# Altium PCB PCB1.PcbDoc (part 1 of 2)
Units mm, origin at the board's own origin, x right, y up, seen from the top; angles counter-clockwise.
Board outline 98 x 50 mm, 2 copper layers (Top Layer, Bottom Layer), stack 1.534 mm thick; 54 components, 28 nets, 136 pads, 101 vias.
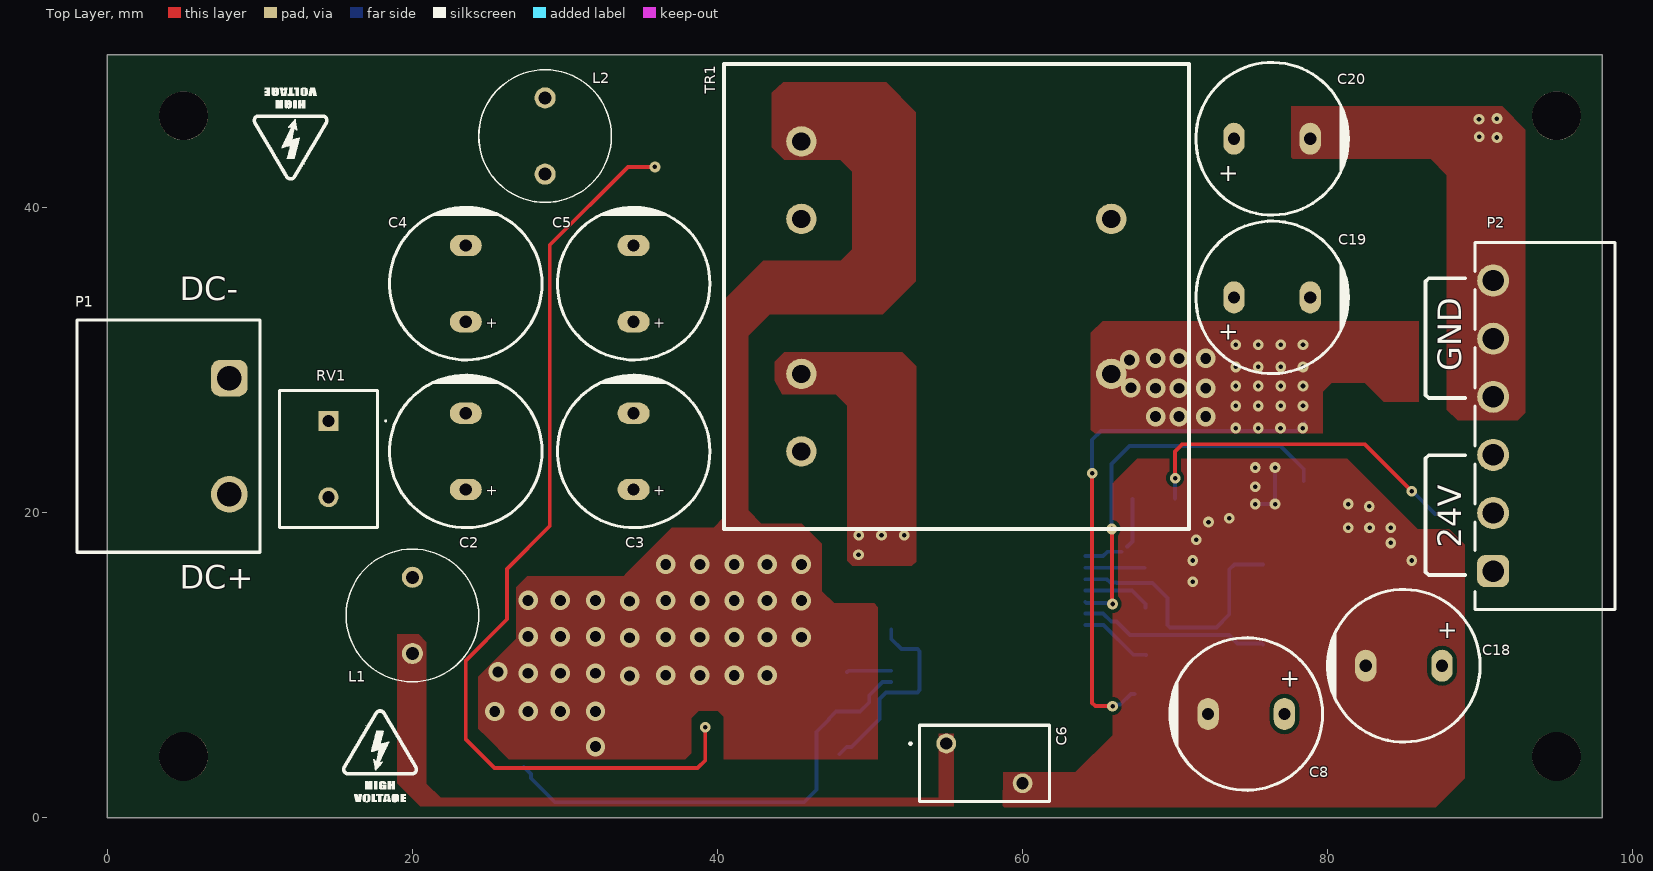
[diagram p0: Top Layer view]
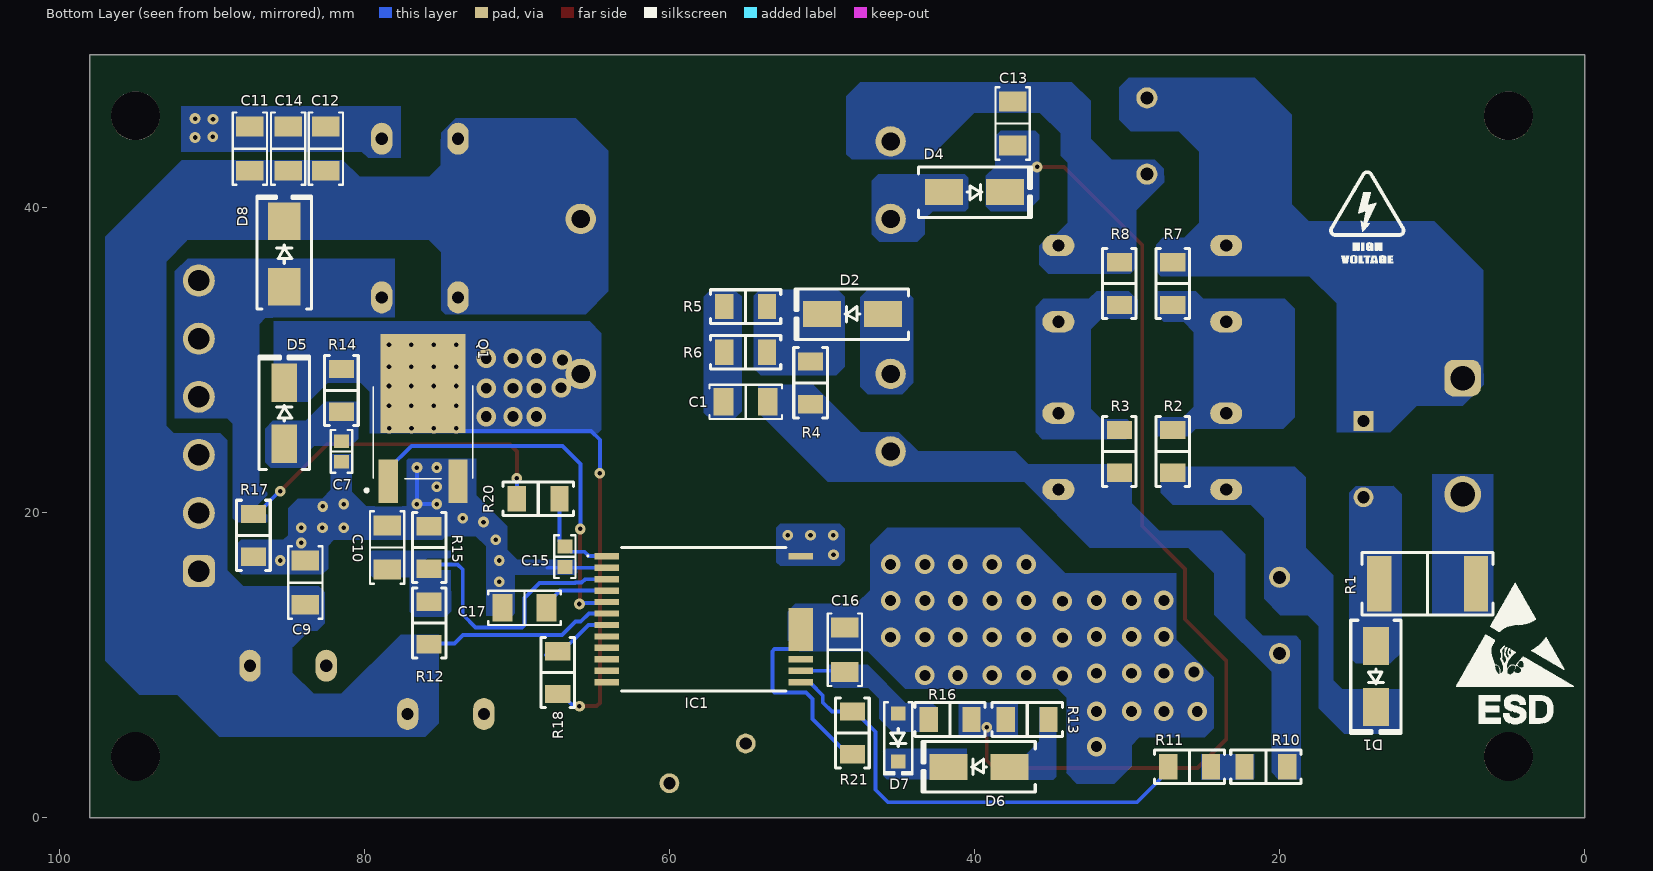
[diagram p1: Bottom Layer view, seen from below]
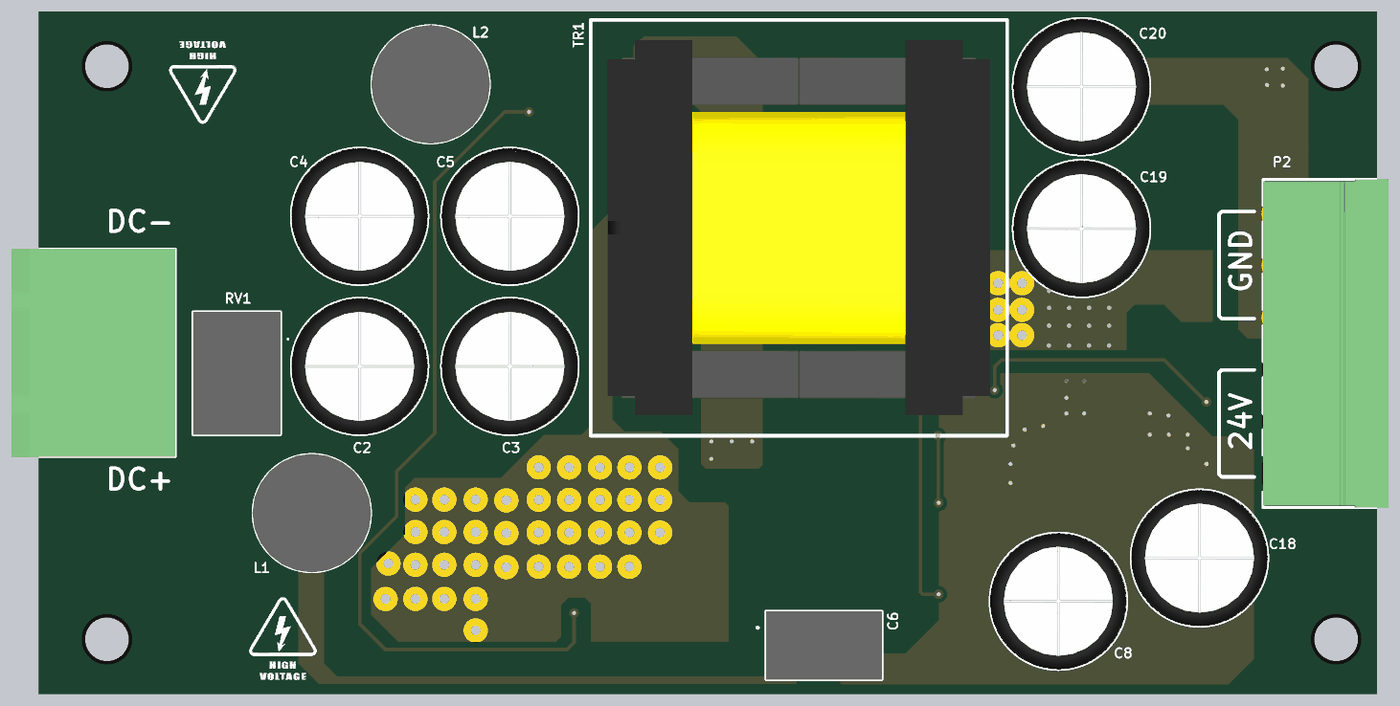
[diagram p2: 3D render of the assembled board from above, using the file's embedded part models]
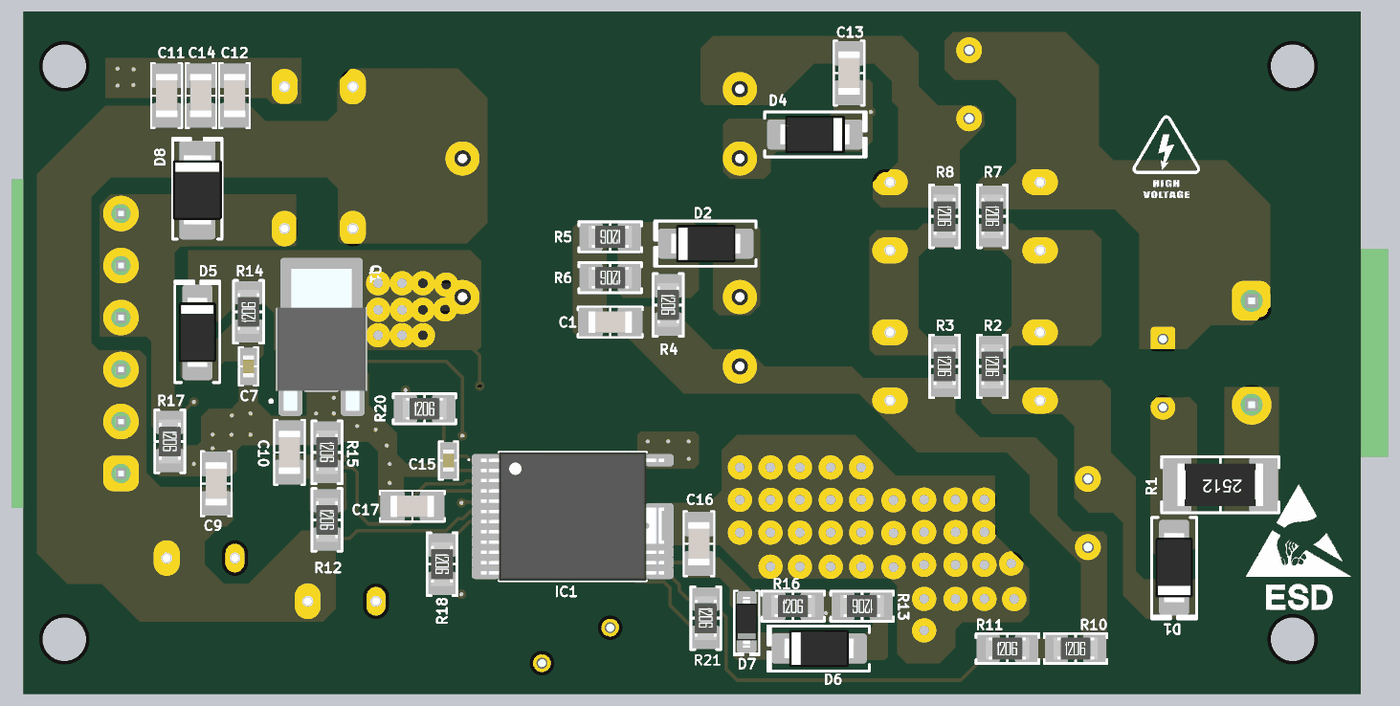
[diagram p3: 3D render of the assembled board from below, using the file's embedded part models]

## Layer stack, top to bottom
Top Solder: solder mask 0.0127, Solder Resist, Dk 3.3
Top Layer: signal copper 0.0178
Dielectric1: core 1.4986, FR-4, Dk 4.3
Bottom Layer: signal copper 0.0178
Bottom Solder: solder mask 0.0127, Solder Resist, Dk 3.3

## Board outline
0,0 0,50 98,50 98,0

## Design rules (kind name [scope] priority, off if disabled: settings)
Clearance Clearance_1 [OnMid vs OnMid] p1: gap=0.254 ignorepadtopadclearanceinfootprint=FALSE sourcerule=38 cellrowname=All cellrowtype=0 cellcolname=All cellcoltype=0 innerlayers=TRUE
Clearance Clearance_2 [(ExistsOnLayer('Top Layer') Or ExistsOnLayer('Bottom Layer')) vs (ExistsOnLayer('Top Layer') Or ExistsOnLayer('Bottom Layer'))] p2: gap=0.254 ignorepadtopadclearanceinfootprint=FALSE sourcerule=38 cellrowname=All cellrowtype=0 cellcolname=All cellcoltype=0 outerlayers=TRUE
Clearance [All] p3: gap=0.254 ignorepadtopadclearanceinfootprint=FALSE ismatrix=TRUE
HoleSize [All] p1: absolutevalues=TRUE maxlimit=7.62 minlimit=0.254 maxpercent=80.000 minpercent=20.000
MinimumAnnularRing [All] p1: minimumring=0.254
PasteMaskExpansion [All] p1: expansion=0.254
PlaneClearance [All] p1: clearance=0.381
PlaneConnect [All] p1: planeconnectstyle=Direct reliefexpansion=0.508 reliefentries=4 reliefconductorwidth=0.254 reliefairgap=0.254
PolygonConnect [All] p1: connectstyle=Direct reliefconductorwidth=0.254 reliefentries=4 polygonreliefangle="90 Angle" airgapwidth=0.254
RoutingVias [All] p1: holewidth=0.711 width=1.27 viastyle="Through Hole" minholewidth=0.711 minwidth=1.27 maxholewidth=0.711 maxwidth=1.27
SMDNeckDown [All] p1: percent=100.000
SilkToSolderMaskClearance SilkscreenOverComponentPads [IsPad] p1: minsilkscreentomaskgap=0.254 clearancetoexposedcopper=TRUE
SolderMaskExpansion [All] p1: expansion=0.254 istentingtop=FALSE
Width [All] p1: maxlimit=0.254 minlimit=0.254 preferedwidth=0.254
25 further rules are at their usual default settings.

## Components (designator, comment, footprint, x,y, rotation, side; value= is the part's Value field where it differs from the comment)
C1 "C1206X222KGRAC7800" "CAP 1206_3216 - 0.8MM" 55,27.25 r180 bottom value="2200 pF"
C2 "ESK106M400AH2EA" "CAP TH ALUM ELEC D10.00mm S5.00mm H17.00mm" 23.5,24 r270 top value=10µF
C3 "ESK106M400AH2EA" "CAP TH ALUM ELEC D10.00mm S5.00mm H17.00mm" 34.5,24 r270 top value=10µF
C4 "ESK106M400AH2EA" "CAP TH ALUM ELEC D10.00mm S5.00mm H17.00mm" 23.5,35 r270 top value=10µF
C5 "ESK106M400AH2EA" "CAP TH ALUM ELEC D10.00mm S5.00mm H17.00mm" 34.5,35 r270 top value=10µF
C6 "F471K33Y5RP6UK5R" F471K33Y5RP6UK5R 55,4.85 r0 top
C7 "CL10B102KB8NNNC" "CAP 0603_1608" 81.5,24 r270 bottom value="1000 pF"
C8 "UVY1V331MPD1TD" "CAP TH ALUM ELEC D10.00mm S5.00mm H14.00mm" 74.662,6.787 r0 top value=330µF
C9 "CL31B225KBHNNNE" "CAP 1206_3216 - 0.8MM" 83.871,15.4 r270 bottom value="2.2 µF"
C10 "885012208072" "CAP 1206_3216 - 0.8MM" 78.5,17.7 r270 bottom value="330 pF"
C11 "CL31A106MBHNNNE" "CAP 1206_3216 - 0.8MM" 87.5,43.85 r270 bottom value="10 µF"
C12 "CL31B225KBHNNNE" "CAP 1206_3216 - 0.8MM" 82.524,43.85 r270 bottom value="2.2 µF"
C13 "CL31A106MBHNNNE" "CAP 1206_3216 - 0.8MM" 37.5,45.5 r270 bottom value="10 µF"
C14 "CL31A106MBHNNNE" "CAP 1206_3216 - 0.8MM" 84.996,43.85 r270 bottom value="10 µF"
C15 "CL10B102KB8NNNC" "CAP 0603_1608" 66.85,17.1 r270 bottom value="1000 pF"
C16 "CL31A106MBHNNNE" "CAP 1206_3216 - 0.8MM" 48.5,11 r90 bottom value="10 µF"
C17 "CL31B225KBHNNNE" "CAP 1206_3216 - 0.8MM" 69.5,13.75 r0 bottom value="2.2 µF"
C18 "UVY1V331MPD1TD" "CAP TH ALUM ELEC D10.00mm S5.00mm H14.00mm" 84.996,9.952 r0 top value=330µF
C19 "UVY1V331MPD1TD" "CAP TH ALUM ELEC D10.00mm S5.00mm H14.00mm" 76.356,34.1 r180 top value=330µF
C20 "UVY1V331MPD1TD" "CAP TH ALUM ELEC D10.00mm S5.00mm H14.00mm" 76.356,44.5 r180 top value=330µF
D1 "US1ML-TP" "DO214AC SMA" 13.684,9.25 r270 bottom
D2 "US1ML-TP" "DO214AC SMA" 48,33 r0 bottom
D4 "US1ML-TP" "DO214AC SMA" 40,41 r180 bottom
D5 "US1ML-TP" "DO214AC SMA" 85.25,26.5 r90 bottom
D6 "US1ML-TP" "DO214AC SMA" 39.7,3.325 r0 bottom
D7 "MMSZ5242B-7-F" SOD-123 45,5.25 r270 bottom
D8 "SMBJ24CD-M3/I" "DO214AA SMB" 85.25,36.935 r90 bottom
IC1 "INN3696C-H606-TL" INN3696CH606TL 57.75,13 r270 bottom
L1 "RLB0914-681KL" RLB0914681KL 20,15.75 r270 top
L2 "RLB0914-681KL" RLB0914681KL 28.7,47.175 r270 top
P1 "691313410002" 691313410002 4,25 r270 top
P2 "691322310006" 691322310006 94.248,25.676 r90 top
Q1 "FDD770N15A" FDD770N15A 76.15,25.25 r180 bottom
R1 "RMCF2512JT10R0" "RES 2512_6432" 10.3,15.325 r0 bottom value="10 Ohms"
R2 "RMCF1206FT100K" "RES 1206_3216" 27,24 r270 bottom value="100 kOhms"
R3 "RMCF1206FT100K" "RES 1206_3216" 30.5,24 r270 bottom value="100 kOhms"
R4 "RC1206FR-07680KL" "RES 1206_3216" 50.75,28.5 r270 bottom value="680 kOhms"
R5 "RC1206JR-7W22RL" "RES 1206_3216" 55,33.5 r0 bottom value="22 Ohms"
R6 "RC1206JR-7W22RL" "RES 1206_3216" 55,30.5 r0 bottom value="22 Ohms"
R7 "RMCF1206FT100K" "RES 1206_3216" 27,35 r270 bottom value="100 kOhms"
R8 "RMCF1206FT100K" "RES 1206_3216" 30.5,35 r270 bottom value="100 kOhms"
R10 "RC1206FR-071M8L" "RES 1206_3216" 20.9,3.325 r180 bottom value="1.8 MOhms"
R11 "RC1206JR-072ML" "RES 1206_3216" 25.9,3.325 r180 bottom value="2 MOhms"
R12 "RC1206JR-07180KL" "RES 1206_3216" 75.75,12.75 r270 bottom value="180 kOhms"
R13 "RC1206JR-0747RL" "RES 1206_3216" 36.543,6.427 r0 bottom value="47 Ohms"
R14 "RC1206JR-7W22RL" "RES 1206_3216" 81.5,28 r90 bottom value="22 Ohms"
R15 "RC1206FR-0710KL" "RES 1206_3216" 75.75,17.7 r270 bottom value="10 kOhms"
R16 "RC1206JR-073KL" "RES 1206_3216" 41.6,6.427 r180 bottom value="3 kOhms"
R17 "PA1206FRE070R01Z" "RES 1206_3216" 87.266,18.5 r270 bottom value="10 mOhms"
R18 "RC1206JR-0747RL" "RES 1206_3216" 67.325,9.5 r270 bottom value="47 Ohms"
R20 "RC1206JR-0747RL" "RES 1206_3216" 68.6,20.895 r180 bottom value="47 Ohms"
R21 "RC1206JR-070RL" "RES 1206_3216" 48,5.55 r270 bottom value="0 Ohms"
RV1 "MOV-07D781KK" MOV07D781KK 14.5,26 r270 top
TR1 "FlybackTransformer" FlybackTransformer 60.74,34.16 r90 top

## Footprints (in the part's own frame and the unit in brackets; to place one, negate y for a bottom-side part, rotate by r counter-clockwise, add the part's x,y. Pads: shape width x height; smd on the part's side, far side on the other; paste and mask are expansions set on the pad)
691313410002 [mm] "7.62 mm - Closed Horizonal PCB Header - 2p"
  rrect50% 2.4x2.4 hole 1.6: 1(-3.81,4)
  round 2.4 hole 1.6: 2(3.81,4)
  silkscreen extent -7.61,-6 7.61,6, body extent -7.62,-6 7.62,6, height 8.55
691322310006 [mm] "Horizontal PCB Header, pitch 3.81mm, 06p"
  rrect50% 2.1x2.1 hole 1.4: 1(-9.525,3.4)
  round 2.1 hole 1.4: 2(-5.715,3.4) 3(-1.905,3.4) 4(1.905,3.4) 5(5.715,3.4) 6(9.525,3.4)
  silkscreen extent -12.02,-4.6 12.03,4.6, body extent -12.02,-4.6 12.02,4.6, height 7.25
"CAP 0603_1608" [mm] "Chip Capacitor, 2-Leads, Body 1.60x0.80mm, IPC Medium Density"
  rect 0.9x1 smd: 1(-0.675,0) 2(0.675,0)
  silkscreen extent -1.4,-0.7 1.4,0.7, body extent -0.8,-0.41 0.8,0.41, height 0.82
"CAP 1206_3216 - 0.8MM" [mm] "Chip Capacitor, 2-Leads, Body 3.25x1.60mm, IPC Medium Density"
  rect 1.3x1.8 smd: 1(-1.45,0) 2(1.45,0)
  silkscreen extent -2.37,-1.12 2.37,1.12, body extent -1.6,-0.8 1.6,0.8, height 0.8
"CAP TH ALUM ELEC D10.00mm S5.00mm H14.00mm" [mm] "10mm Diameter 5mm Lead Spacing Aluminum Electrolytic Capacitors Radial, Can"
  oval 1.4x2.1 hole 0.8: 1(2.5,0) 2(-2.5,0)
  silkscreen extent -5,-5 5,5, body extent -5.01,-5 5,5, height 14
"CAP TH ALUM ELEC D10.00mm S5.00mm H17.00mm" [mm] "10mm Diameter 5mm Lead Spacing Aluminum Electrolytic Capacitors Radial, Can"
  oval 1.4x2.1 hole 0.8: 1(2.5,0) 2(-2.5,0)
  silkscreen extent -5,-5 5,5, body extent -5.01,-5 5,5, height 17
"DO214AA SMB" [mm] "Molded Diode, 2-Leads, Body 4.31x3.62mm, IPC Medium Density"
  rect 2.45x2.15 smd: 1(-2.15,0) 2(2.15,0)
  silkscreen extent -3.6,-1.8 3.8,1.8, body extent -2.6,-1.8 2.6,1.8, height 2.4
"DO214AC SMA" [mm] "Molded Diode, 2-Leads, Body 4.30x2.60mm, IPC Medium Density"
  rect 2.5x1.7 smd: 1(-2,0) 2(2,0)
  silkscreen extent -3.68,-1.65 3.75,1.65, body extent -2.6,-1.37 2.6,1.37, height 2.4
F471K33Y5RP6UK5R [mm]
  round 1.3 hole 0.8: 1(0,0) 2(5,-2.6)
  silkscreen extent -2.4,-3.8 6.75,1.2, body extent -1.75,-3.8 6.75,1.2, height 8.6
FDD770N15A [mm]
  rect 1.25x2.85 smd: 1(-2.28,-3.2) 3(2.28,-3.2)
  rect 5.55x6.5 smd: 2(0,3.2)
  silkscreen extent -3.8,-3.9 3.27,3.05, body extent -3.27,-4.5 3.27,5.89, height 2.49
FlybackTransformer [mm] "B66317G0160X187  Gapped ferrite fore / Coil former  66208B1110T001"
  round 2 hole 1.2: 1(-10.16,15.24) 2(-5.08,15.24) 3(5.08,-5.08) 4(-5.08,-5.08) 5(5.08,15.24) 6(10.16,15.24)
  silkscreen extent -15.24,-10.16 15.24,20.32, body extent -13.75,-8.92 13.75,19.08, height 22.9
INN3696CH606TL [mm]
  rect 0.41x1.58 smd: 1(-4.125,-6.36) 2(-3.375,-6.36) 3(-2.625,-6.36) 4(-1.875,-6.36) 5(-1.125,-6.36) 6(-0.375,-6.36) 7(0.375,-6.36) 8(1.125,-6.36) 9(1.875,-6.36) 10(2.625,-6.36) 11(3.375,-6.36) 12(4.125,-6.36) 13(4.125,6.36) 14(3.375,6.36) 15(2.625,6.36) 24(-4.125,6.36)
  rect 2.81x1.58 smd: 16(0.675,6.36)
  silkscreen extent -4.7,-7.65 4.7,5.4, body extent -4.7,-6.72 4.7,6.72, height 1.6
MOV07D781KK [mm]
  rect 1.3x1.3 hole 0.8: 1(0,0)
  round 1.3 hole 0.8: 2(5,0)
  silkscreen extent -2,-3.2 7,3.8, body extent -2,-3.2 7,3.2, height 13.6
"RES 1206_3216" [mm] "Chip Resistor, 2-Leads, Body 3.13x1.55mm, IPC Medium Density"
  rect 1.2x1.65 smd: 1(-1.4,0) 2(1.4,0)
  silkscreen extent -2.3,-1.1 2.3,1.1, body extent -1.6,-0.8 1.6,0.8, height 0.6
"RES 2512_6432" [mm] "Chip Resistor, 2-Leads, Body 6.30x3.15mm, IPC Medium Density"
  rect 1.6x3.65 smd: 1(-3.175,0) 2(3.175,0)
  silkscreen extent -4.3,-2.05 4.3,2.05, body extent -3.15,-1.58 3.15,1.57, height 0.7
RLB0914681KL [mm]
  round 1.381 hole 0.85: 1(0,0) 2(5,0)
  silkscreen extent -1.85,-4.35 6.85,4.35, body extent -1.85,-4.34 6.85,4.34, height 13.1
SOD-123 [mm] "SOD, 2-Leads, Body 1.55x3.70mm, IPC Medium Density"
  rect 0.9x0.95 smd: 1(-1.575,0) 2(1.575,0)
  silkscreen extent -2.3,-0.92 2.41,0.92, body extent -1.86,-0.78 1.86,0.77, height 1.35

## Part data
C1: library part CMP-216-004562-1, "CAP CER 2200PF 2KV X7R 1206", Capacitance="2200 pF", Device Package="1206 (3216 Metric)", Manufacturer=KEMET, Operating Temperature="-55°C ~ 125°C", Temperature Coefficient=X7R, Tolerance=±10%, Voltage - Rated="2000V (2kV)", Applications="Boardflex Sensitive", ComponentLink1Description=Datasheet, ComponentLink1URL=https://api.kemet.com/component-edge/download/datasheet/C1206X222KGRAC7800.pdf, ComponentLink2Description="DigiKey Link", ComponentLink2URL=https://www.digikey.com/en/products/detail/kemet/C1206X222KGRAC7800/6126197, Features="Low ESL, Soft Termination, High Voltage", lastupdated="9/4/2023 7:14:42 PM", Lifecycle Status=Active, Minimum Order=1, Mounting Type="Surface Mount, MLCC", Package / Case="1206 (3216 Metric)", packaging=TapeAndReel, Part Number=C1206X222KGRAC7800, Part Status=Active, partid=41595, price=0.16, series="SMD Comm X7R HV Flex", Size / Dimension="0.130\" L x 0.063\" W (3.30mm x 1.60mm)", Thickness (Max)="0.073\" (1.85mm)"
C2 C3 C4 C5: library part CMP-208-002450-1, "CAP ALUM 10UF 20% 400V THRUHOLE", Capacitance=10µF, Device Package="Radial, Can", Lifetime @ Temp.="2000 Hrs @ 85°C", Manufacturer=KEMET, Operating Temperature="-25°C ~ 85°C", Ripple Current @ High Frequency="70mA @ 10kHz", Ripple Current @ Low Frequency="50mA @ 120Hz", Tolerance=±20%, Voltage - Rated=400V, Applications="General Purpose", ComponentLink1Description=Datasheet, ComponentLink1URL=https://api.kemet.com/component-edge/download/datasheet/ESK106M400AH2EA.pdf, ComponentLink2Description="DigiKey Link", ComponentLink2URL=http://digikey.com/product-detail/en/kemet/ESK106M400AH2EA/399-18271-1-ND/9448289, Height - Seated (Max)="0.669\" (17.00mm)", lastupdated="9/2/2020 1:31:20 AM", Lead Spacing="0.197\" (5.00mm)", Lifecycle Status=Active, Minimum Order=1, Mounting Type="Through Hole", Package / Case="Radial, Can", packaging=TapeAndBox, Part Number=ESK106M400AH2EA, Part Status=Active, partid=11674, Polarization=Polar, price=0.17, series=ESK, Size / Dimension="0.394\" Dia (10.00mm)"
C6: "Capacitor", Manufacturer_Name=Vishay, Mouser Part Number=594-F471K33Y5RP6UK5R, Arrow Part Number=F471K33Y5RP6UK5R, Arrow Price/Stock=https://www.arrow.com/en/products/f471k33y5rp6uk5r/vishay, Datasheet Link=https://www.vishay.com/docs/28500/fseries.pdf, Height=8.5mm, Manufacturer_Part_Number=F471K33Y5RP6UK5R, Mouser Price/Stock=https://www.mouser.co.uk/ProductDetail/Vishay-BC-Components/F471K33Y5RP6UK5R?qs=ftzNSb6%2F63rYeg13XZow8A%3D%3D
C7 C15: library part CMP-214-000786-1, "CAP CER 1000PF 50V X7R 0603", Capacitance="1000 pF", Device Package="0603 (1608 Metric)", Manufacturer="Samsung Electro-Mechanics", Operating Temperature="-55°C ~ 125°C", Temperature Coefficient=X7R, Tolerance=±10%, Voltage - Rated=50V, Applications="General Purpose", ComponentLink1Description=Datasheet, ComponentLink1URL=http://www.samsungsem.com/kr/support/product-search/mlcc/CL10B102KB8NNNC.jsp, ComponentLink2Description="DigiKey Link", ComponentLink2URL=https://www.digikey.com/en/products/detail/samsung-electro-mechanics/CL10B102KB8NNNC/3886676, lastupdated="9/4/2023 7:08:47 PM", Lifecycle Status=Active, Minimum Order=1, Mounting Type="Surface Mount, MLCC", Package / Case="0603 (1608 Metric)", packaging=TapeAndReel, Part Number=CL10B102KB8NNNC, Part Status=Active, partid=5511, price=0.01, series=CL, Size / Dimension="0.063\" L x 0.031\" W (1.60mm x 0.80mm)", Thickness (Max)="0.035\" (0.90mm)"
C8 C18 C19 C20: library part CMP-208-002055-1, "CAP ALUM 330UF 20% 35V RADIAL", Capacitance=330µF, Device Package="Radial, Can", Lifetime @ Temp.="1000 Hrs @ 105°C", Manufacturer=Nichicon, Operating Temperature="-55°C ~ 105°C", Ripple Current @ Low Frequency="350mA @ 120Hz", Tolerance=±20%, Voltage - Rated=35V, Applications="General Purpose", ComponentLink1Description=Datasheet, ComponentLink1URL=http://nichicon-us.com/english/products/pdfs/e-uvy.pdf, ComponentLink2Description="DigiKey Link", ComponentLink2URL=http://digikey.com/product-detail/en/nichicon/UVY1V331MPD1TD/493-12941-1-ND/4328558, Height - Seated (Max)="0.551\" (14.00mm)", lastupdated="9/2/2020 1:31:12 AM", Lead Spacing="0.197\" (5.00mm)", Lifecycle Status=Active, Minimum Order=1, Mounting Type="Through Hole", Package / Case="Radial, Can", packaging=TapeAndBox, Part Number=UVY1V331MPD1TD, Part Status=Active, partid=11279, Polarization=Polar, price=0.15, series=UVY, Size / Dimension="0.394\" Dia (10.00mm)"
C9 C12 C17: library part CMP-216-001888-1, "CAP CER 2.2UF 50V X7R 1206", Capacitance="2.2 µF", Device Package="1206 (3216 Metric)", Manufacturer="Samsung Electro-Mechanics", Operating Temperature="-55°C ~ 125°C", Temperature Coefficient=X7R, Tolerance=±10%, Voltage - Rated=50V, Applications="General Purpose", ComponentLink1Description=Datasheet, ComponentLink1URL=http://www.samsungsem.com/kr/support/product-search/mlcc/CL31B225KBHNNNE.jsp, ComponentLink2Description="DigiKey Link", ComponentLink2URL=https://www.digikey.com/en/products/detail/samsung-electro-mechanics/CL31B225KBHNNNE/3886949, lastupdated="9/4/2023 7:14:28 PM", Lifecycle Status=Active, Minimum Order=1, Mounting Type="Surface Mount, MLCC", Package / Case="1206 (3216 Metric)", packaging=TapeAndReel, Part Number=CL31B225KBHNNNE, Part Status=Active, partid=21783, price=0.03, series=CL, Size / Dimension="0.126\" L x 0.063\" W (3.20mm x 1.60mm)", Thickness (Max)="0.071\" (1.80mm)"
C10: library part CMP-216-003309-1, "CAP CER 330PF 50V X7R 1206", Capacitance="330 pF", Device Package="1206 (3216 Metric)", Manufacturer="Würth Elektronik", Operating Temperature="-55°C ~ 125°C", Temperature Coefficient=X7R, Tolerance=±10%, Voltage - Rated=50V, Applications="General Purpose", ComponentLink1Description=Datasheet, ComponentLink1URL=https://www.we-online.com/katalog/datasheet/885012208072.pdf, ComponentLink2Description="DigiKey Link", ComponentLink2URL=https://www.digikey.com/en/products/detail/würth-elektronik/885012208072/5453967, lastupdated="9/4/2023 7:14:05 PM", Lifecycle Status=Active, Minimum Order=1, Mounting Type="Surface Mount, MLCC", Package / Case="1206 (3216 Metric)", packaging=TapeAndReel, Part Number=885012208072, Part Status=Active, partid=30869, price=0.06, series=WCAP-CSGP, Size / Dimension="0.126\" L x 0.063\" W (3.20mm x 1.60mm)", Thickness (Max)="0.035\" (0.90mm)"
C11 C13 C14 C16: library part CMP-216-001901-1, "CAP CER 10UF 50V X5R 1206", Capacitance="10 µF", Device Package="1206 (3216 Metric)", Manufacturer="Samsung Electro-Mechanics", Operating Temperature="-55°C ~ 85°C", Temperature Coefficient=X5R, Tolerance=±20%, Voltage - Rated=50V, Applications="General Purpose", ComponentLink1Description=Datasheet, ComponentLink1URL=http://www.samsungsem.com/kr/support/product-search/mlcc/CL31A106MBHNNNE.jsp, ComponentLink2Description="DigiKey Link", ComponentLink2URL=https://www.digikey.com/en/products/detail/samsung-electro-mechanics/CL31A106MBHNNNE/5961220, lastupdated="9/4/2023 7:14:28 PM", Lifecycle Status=Active, Minimum Order=1, Mounting Type="Surface Mount, MLCC", Package / Case="1206 (3216 Metric)", packaging=TapeAndReel, Part Number=CL31A106MBHNNNE, Part Status=Active, partid=21805, price=0.04, series=CL, Size / Dimension="0.126\" L x 0.063\" W (3.20mm x 1.60mm)", Thickness (Max)="0.071\" (1.80mm)"
D1 D2 D4 D5 D6: library part CMP-254-000890-1, "DIODE GEN PURP 1KV 1A DO214AC", Capacitance @ Vr, F="8pF @ 4V, 1MHz", Current - Average Rectified (Io)=1A, Current - Reverse Leakage @ Vr="5 µA @ 1000 V", Manufacturer="Micro Commercial Co", Operating Temperature - Junction="-55°C ~ 150°C", Package / Case="DO-214AC, SMA", Supplier Device Package="DO-214AC (SMA)", Voltage - DC Reverse (Vr) (Max)="1000 V", Voltage - Forward (Vf) (Max) @ If="1.5 V @ 1 A", ComponentLink1Description=Datasheet, ComponentLink1URL=https://www.mccsemi.com/pdf/Products/US1ML(DO-214AC)-A.pdf, ComponentLink2Description="DigiKey Link", ComponentLink2URL=https://www.digikey.com/en/products/detail/micro-commercial-co/US1ML-TP/7681879, Diode Type=Standard, lastupdated="9/4/2023 8:16:02 PM", Lifecycle Status=Active, Minimum Order=1, Mounting Type="Surface Mount", packaging=TapeAndReel, Part Number=US1ML-TP, Part Status=Active, partid=891, price=0.04, Reverse Recovery Time (trr)="120 ns", series=-, Speed="Fast Recovery =< 500ns, > 200mA (Io)"
D7: library part CMP-257-001455-1, "DIODE ZENER 12V 500MW SOD123", Current - Reverse Leakage @ Vr="1 µA @ 9.1 V", Manufacturer="Diodes Incorporated", Operating Temperature="-65°C ~ 150°C", Package / Case=SOD-123, Power - Max="500 mW", Tolerance=±5%, Voltage - Forward (Vf) (Max) @ If="900 mV @ 10 mA", Voltage - Zener (Nom) (Vz)="12 V", ComponentLink1Description=Datasheet, ComponentLink1URL=https://www.diodes.com/assets/Datasheets/ds18010.pdf, ComponentLink2Description="DigiKey Link", ComponentLink2URL=https://www.digikey.com/en/products/detail/diodes-incorporated/MMSZ5242B-7-F/814367, Impedance (Max) (Zzt)="30 Ohms", lastupdated="9/4/2023 8:17:16 PM", Lifecycle Status=Active, Minimum Order=1, Mounting Type="Surface Mount", packaging=TapeAndReel, Part Number=MMSZ5242B-7-F, Part Status=Active, partid=2231, price=0.02, series=-, Supplier Device Package=SOD-123
D8: library part CMP-255-003391-1, "TVS DIODE 24V 38.4V DO214AA", Current - Peak Pulse (10/1000µs)=15.6A, Manufacturer="Vishay Semiconductor Diodes Division", Operating Temperature="-55°C ~ 150°C (TJ)", Package / Case="DO-214AA, SMB", Power - Peak Pulse=600W, Power Line Protection=No, Supplier Device Package="DO-214AA (SMBJ)", Voltage - Breakdown (Min)=27.1V, Voltage - Clamping (Max) @ Ipp=38.4V, Voltage - Reverse Standoff (Typ)=24V, Applications="General Purpose", Bidirectional Channels=1, ComponentLink1Description=Datasheet, ComponentLink1URL=http://www.vishay.com/docs/87606/87606.pdf, ComponentLink2Description="DigiKey Link", ComponentLink2URL=http://digikey.com/product-detail/en/vishay-semiconductor-diodes-division/SMBJ24CD-M3-I/SMBJ24CD-M3-IGICT-ND/7915510, lastupdated="9/4/2023 8:39:18 PM", Lifecycle Status=Active, Minimum Order=1, Mounting Type="Surface Mount", packaging=TapeAndReel, Part Number=SMBJ24CD-M3/I, Part Status=Active, partid=8867, price=0.11, series=TransZorb®, Type=Zener
IC1: library part CMP-031-00006-1, "AC/DC Converters 35W 230VAC 30W 15mW 900V FET", Manufacturer_Name="Power Integrations", Mouser Part Number=869-INN3696C-H606-TL, Datasheet Link=https://ac-dc.power.com/sites/default/files/product_document/data_sheet/innoswitch3-ep_family_datasheet.pdf, Design Item ID=INN3696C-H606-TL, Height=1.6mm, Manufacturer_Part_Number=INN3696C-H606-TL, Mouser Price/Stock=https://www.mouser.co.uk/ProductDetail/Power-Integrations/INN3696C-H606-TL?qs=T3oQrply3y%252BBKBkU3yymrA%3D%3D, Source=SamacSys.SchLib
L1 L2: "Inductor", Manufacturer_Name=Bourns, Mouser Part Number=652-RLB0914-681KL, Arrow Part Number=RLB0914-681KL, Arrow Price/Stock=https://www.arrow.com/en/products/rlb0914-681kl/bourns, Datasheet Link=https://www.bourns.com/docs/Product-Datasheets/rlb.pdf, Height=13mm, Manufacturer_Part_Number=RLB0914-681KL, Mouser Price/Stock=https://www.mouser.co.uk/ProductDetail/Bourns/RLB0914-681KL?qs=AC4ivEYFOTCNo0lEn%252BtUFw%3D%3D
P1: library part CMP-002-02061-1, "WR-TBL Series 3134 Close Horizontal PCB Header, THT, pitch 7.62mm, 2p", Manufacturer="Wurth Elektronik", Operating Temperature Max=105°C, Operating Temperature Min=-40°C, Rated Current=20A, Working Voltage=300V, Application=Pluggable, Category="Terminal Blocks", ComponentLink1Description="Website Link", ComponentLink1URL=https://www.we-online.com/redexpert/article/691313410002?ad, ComponentLink2Description="Datasheet Link", ComponentLink2URL=https://www.we-online.com/redexpert/spec/691313410002?ad, Manufacturer Part Number=691313410002, Match Code=WR-TBL, Modularity=No, Mount="Through Hole", Number of Rows=1, Orientation=Horizontal, packaging=Box, Pins=2, Pitch=7.62mm
P2: library part CMP-002-02226-1, "WR-TBL Series 322 Horizontal PCB Header, THT, pitch 3.81mm, 6p", Manufacturer="Wurth Elektronik", Operating Temperature Max=105°C, Operating Temperature Min=-40°C, Rated Current=10A, Working Voltage=300V, Application=Pluggable, Category="Terminal Blocks", ComponentLink1Description="Website Link", ComponentLink1URL=https://www.we-online.com/redexpert/article/691322310006?ad, ComponentLink2Description="Datasheet Link", ComponentLink2URL=https://www.we-online.com/redexpert/spec/691322310006?ad, Manufacturer Part Number=691322310006, Match Code=WR-TBL, Modularity=No, Mount="Through Hole", Number of Rows=1, Orientation=Horizontal, packaging=Box, Pins=6, Pitch=3.81mm
Q1: "Transistor", Manufacturer_Name=onsemi, Mouser Part Number=512-FDD770N15A, Arrow Part Number=FDD770N15A, Arrow Price/Stock=https://www.arrow.com/en/products/fdd770n15a/on-semiconductor?region=nac, Datasheet Link=https://componentsearchengine.com/Datasheets/2/FDD770N15A.pdf, Height=2.39mm, Manufacturer_Part_Number=FDD770N15A, Mouser Price/Stock=https://www.mouser.co.uk/ProductDetail/onsemi-Fairchild/FDD770N15A?qs=%2FrNExBQRqERIwYieQRWQ%252Bg%3D%3D
R1: library part CMP-331-003356-1, "RES 10 OHM 5% 1W 2512", Device Package="2512 (6432 Metric)", Manufacturer="Stackpole Electronics Inc", Operating Temperature="-55°C ~ 155°C", Power (Watts)=1W, Ratings=AEC-Q200, Resistance="10 Ohms", Supplier Device Package=2512, Temperature Coefficient=±200ppm/°C, Tolerance=±5%, ComponentLink1Description=Datasheet, ComponentLink1URL=https://www.seielect.com/catalog/sei-rmcf_rmcp.pdf, ComponentLink2Description="DigiKey Link", ComponentLink2URL=http://digikey.com/product-detail/en/stackpole-electronics-inc/RMCF2512JT10R0/RMCF2512JT10R0CT-ND/1942610, Composition="Thick Film", Features="Automotive AEC-Q200", Height - Seated (Max)="0.028\" (0.70mm)", lastupdated="9/2/2020 1:27:06 AM", Lifecycle Status=Active, Minimum Order=1, Number of Terminations=2, Package / Case="2512 (6432 Metric)", packaging=TapeAndReel, Part Number=RMCF2512JT10R0, Part Status=Active, price=0.03, series=RMCF, Size / Dimension="0.248\" L x 0.126\" W (6.30mm x 3.20mm)"
R2 R3 R7 R8: library part CMP-329-006653-1, "RES 100K OHM 1% 1/4W 1206", Device Package="1206 (3216 Metric)", Manufacturer="Stackpole Electronics Inc", Operating Temperature="-55°C ~ 155°C", Power (Watts)="0.25W, 1/4W", Ratings=AEC-Q200, Resistance="100 kOhms", Supplier Device Package=1206, Temperature Coefficient=±100ppm/°C, Tolerance=±1%, ComponentLink1Description=Datasheet, ComponentLink1URL=https://www.seielect.com/catalog/sei-rmcf_rmcp.pdf, ComponentLink2Description="DigiKey Link", ComponentLink2URL=https://www.digikey.com/en/products/detail/stackpole-electronics-inc/RMCF1206FT100K/1759689, Composition="Thick Film", Features="Automotive AEC-Q200", Height - Seated (Max)="0.028\" (0.70mm)", lastupdated="9/4/2023 7:43:30 PM", Lifecycle Status=Active, Minimum Order=1, Number of Terminations=2, Package / Case="1206 (3216 Metric)", packaging=TapeAndReel, Part Number=RMCF1206FT100K, Part Status=Active, partid=39304, price=0.01, series=RMCF, Size / Dimension="0.126\" L x 0.063\" W (3.20mm x 1.60mm)"
R4: library part CMP-329-005710-1, "RES 680K OHM 1% 1/4W 1206", Device Package="1206 (3216 Metric)", Manufacturer=Yageo, Operating Temperature="-55°C ~ 155°C", Power (Watts)="0.25W, 1/4W", Resistance="680 kOhms", Supplier Device Package=1206, Temperature Coefficient=±100ppm/°C, Tolerance=±1%, ComponentLink1Description=Datasheet, ComponentLink1URL=https://www.yageo.com/upload/media/product/productsearch/datasheet/rchip/PYu-RC_Group_51_RoHS_L_10.pdf, ComponentLink2Description="DigiKey Link", ComponentLink2URL=https://www.digikey.com/en/products/detail/yageo/RC1206FR-07680KL/729065, Composition="Thick Film", Features="Moisture Resistant", Height - Seated (Max)="0.026\" (0.65mm)", lastupdated="9/4/2023 7:43:38 PM", Lifecycle Status=Active, Minimum Order=1, Number of Terminations=2, Package / Case="1206 (3216 Metric)", packaging=TapeAndReel, Part Number=RC1206FR-07680KL, Part Status=Active, partid=37411, price=0.01, series=RC_L, Size / Dimension="0.122\" L x 0.063\" W (3.10mm x 1.60mm)"
R5 R6 R14: library part CMP-329-010863-1, "RES 22 OHM 5% 1/2W 1206", Device Package="1206 (3216 Metric)", Manufacturer=Yageo, Operating Temperature="-55°C ~ 155°C", Power (Watts)="0.5W, 1/2W", Resistance="22 Ohms", Supplier Device Package=1206, Temperature Coefficient=±200ppm/°C, Tolerance=±5%, ComponentLink1Description=Datasheet, ComponentLink1URL=https://www.yageo.com/upload/media/product/productsearch/datasheet/rchip/PYu-RC_Group_51_RoHS_L_11.pdf, ComponentLink2Description="DigiKey Link", ComponentLink2URL=https://www.digikey.com/en/products/detail/yageo/RC1206JR-7W22RL/12698851, Composition="Thick Film", Features="Moisture Resistant", Height - Seated (Max)="0.026\" (0.65mm)", lastupdated="9/4/2023 7:42:52 PM", Lifecycle Status=Active, Minimum Order=1, Number of Terminations=2, Package / Case="1206 (3216 Metric)", packaging=TapeAndReel, Part Number=RC1206JR-7W22RL, Part Status=Active, partid=58538, price=0.02, series=RC_L, Size / Dimension="0.122\" L x 0.063\" W (3.10mm x 1.60mm)"
R10: library part CMP-329-003141-1, "RES 1.8M OHM 1% 1/4W 1206", Device Package="1206 (3216 Metric)", Manufacturer=Yageo, Operating Temperature="-55°C ~ 155°C", Power (Watts)="0.25W, 1/4W", Resistance="1.8 MOhms", Supplier Device Package=1206, Temperature Coefficient=±100ppm/°C, Tolerance=±1%, ComponentLink1Description=Datasheet, ComponentLink1URL=https://www.yageo.com/upload/media/product/productsearch/datasheet/rchip/PYu-RC_Group_51_RoHS_L_10.pdf, ComponentLink2Description="DigiKey Link", ComponentLink2URL=https://www.digikey.com/en/products/detail/yageo/RC1206FR-071M8L/728469, Composition="Thick Film", Features="Moisture Resistant", Height - Seated (Max)="0.026\" (0.65mm)", lastupdated="9/4/2023 7:43:59 PM", Lifecycle Status=Active, Minimum Order=1, Number of Terminations=2, Package / Case="1206 (3216 Metric)", packaging=TapeAndReel, Part Number=RC1206FR-071M8L, Part Status=Active, partid=32269, price=0.01, series=RC_L, Size / Dimension="0.122\" L x 0.063\" W (3.10mm x 1.60mm)"
R11: library part CMP-329-007943-1, "RES 2M OHM 5% 1/4W 1206", Device Package="1206 (3216 Metric)", Manufacturer=Yageo, Operating Temperature="-55°C ~ 155°C", Power (Watts)="0.25W, 1/4W", Resistance="2 MOhms", Supplier Device Package=1206, Temperature Coefficient=±100ppm/°C, Tolerance=±5%, ComponentLink1Description=Datasheet, ComponentLink1URL=https://www.yageo.com/upload/media/product/productsearch/datasheet/rchip/PYu-RC_Group_51_RoHS_L_10.pdf, ComponentLink2Description="DigiKey Link", ComponentLink2URL=https://www.digikey.com/en/products/detail/yageo/RC1206JR-072ML/729237, Composition="Thick Film", Features="Moisture Resistant", Height - Seated (Max)="0.026\" (0.65mm)", lastupdated="9/4/2023 7:43:19 PM", Lifecycle Status=Active, Minimum Order=1, Number of Terminations=2, Package / Case="1206 (3216 Metric)", packaging=TapeAndReel, Part Number=RC1206JR-072ML, Part Status=Active, partid=41862, price=0.01, series=RC_L, Size / Dimension="0.122\" L x 0.063\" W (3.10mm x 1.60mm)"
R12: library part CMP-329-007945-1, "RES 180K OHM 5% 1/4W 1206", Device Package="1206 (3216 Metric)", Manufacturer=Yageo, Operating Temperature="-55°C ~ 155°C", Power (Watts)="0.25W, 1/4W", Resistance="180 kOhms", Supplier Device Package=1206, Temperature Coefficient=±100ppm/°C, Tolerance=±5%, ComponentLink1Description=Datasheet, ComponentLink1URL=https://www.yageo.com/upload/media/product/productsearch/datasheet/rchip/PYu-RC_Group_51_RoHS_L_10.pdf, ComponentLink2Description="DigiKey Link", ComponentLink2URL=https://www.digikey.com/en/products/detail/yageo/RC1206JR-07180KL/729232, Composition="Thick Film", Features="Moisture Resistant", Height - Seated (Max)="0.026\" (0.65mm)", lastupdated="9/4/2023 7:43:19 PM", Lifecycle Status=Active, Minimum Order=1, Number of Terminations=2, Package / Case="1206 (3216 Metric)", packaging=TapeAndReel, Part Number=RC1206JR-07180KL, Part Status=Active, partid=41866, price=0.01, series=RC_L, Size / Dimension="0.122\" L x 0.063\" W (3.10mm x 1.60mm)"
R13 R18 R20: library part CMP-329-000945-1, "RES 47 OHM 5% 1/4W 1206", Device Package="1206 (3216 Metric)", Manufacturer=Yageo, Operating Temperature="-55°C ~ 155°C", Power (Watts)="0.25W, 1/4W", Resistance="47 Ohms", Supplier Device Package=1206, Temperature Coefficient=±100ppm/°C, Tolerance=±5%, ComponentLink1Description=Datasheet, ComponentLink1URL=https://www.yageo.com/upload/media/product/productsearch/datasheet/rchip/PYu-RC_Group_51_RoHS_L_10.pdf, ComponentLink2Description="DigiKey Link", ComponentLink2URL=https://www.digikey.com/en/products/detail/yageo/RC1206JR-0747RL/2827653, Composition="Thick Film", Features="Moisture Resistant", Height - Seated (Max)="0.026\" (0.65mm)", lastupdated="9/4/2023 7:44:16 PM", Lifecycle Status=Active, Minimum Order=1, Number of Terminations=2, Package / Case="1206 (3216 Metric)", packaging=TapeAndReel, Part Number=RC1206JR-0747RL, Part Status=Active, partid=27879, price=0.01, series=RC_L, Size / Dimension="0.122\" L x 0.063\" W (3.10mm x 1.60mm)"
R15: library part CMP-329-006607-1, "RES 10K OHM 1% 1/4W 1206", Device Package="1206 (3216 Metric)", Manufacturer=Yageo, Operating Temperature="-55°C ~ 155°C", Power (Watts)="0.25W, 1/4W", Resistance="10 kOhms", Supplier Device Package=1206, Temperature Coefficient=±100ppm/°C, Tolerance=±1%, ComponentLink1Description=Datasheet, ComponentLink1URL=https://www.yageo.com/upload/media/product/productsearch/datasheet/rchip/PYu-RC_Group_51_RoHS_L_10.pdf, ComponentLink2Description="DigiKey Link", ComponentLink2URL=https://www.digikey.com/en/products/detail/yageo/RC1206FR-0710KL/728483, Composition="Thick Film", Features="Moisture Resistant", Height - Seated (Max)="0.026\" (0.65mm)", lastupdated="9/4/2023 7:43:30 PM", Lifecycle Status=Active, Minimum Order=1, Number of Terminations=2, Package / Case="1206 (3216 Metric)", packaging=TapeAndReel, Part Number=RC1206FR-0710KL, Part Status=Active, partid=39204, price=0.01, series=RC_L, Size / Dimension="0.122\" L x 0.063\" W (3.10mm x 1.60mm)"
R16: library part CMP-329-000994-1, "RES 3K OHM 5% 1/4W 1206", Device Package="1206 (3216 Metric)", Manufacturer=Yageo, Operating Temperature="-55°C ~ 155°C", Power (Watts)="0.25W, 1/4W", Resistance="3 kOhms", Supplier Device Package=1206, Temperature Coefficient=±100ppm/°C, Tolerance=±5%, ComponentLink1Description=Datasheet, ComponentLink1URL=https://www.yageo.com/upload/media/product/productsearch/datasheet/rchip/PYu-RC_Group_51_RoHS_L_10.pdf, ComponentLink2Description="DigiKey Link", ComponentLink2URL=https://www.digikey.com/en/products/detail/yageo/RC1206JR-073KL/729264, Composition="Thick Film", Features="Moisture Resistant", Height - Seated (Max)="0.026\" (0.65mm)", lastupdated="9/4/2023 7:44:15 PM", Lifecycle Status=Active, Minimum Order=1, Number of Terminations=2, Package / Case="1206 (3216 Metric)", packaging=TapeAndReel, Part Number=RC1206JR-073KL, Part Status=Active, partid=27969, price=0.01, series=RC_L, Size / Dimension="0.122\" L x 0.063\" W (3.10mm x 1.60mm)"
R17: library part CMP-329-013774-1, "RES 0.01 OHM 1% 1/4W 1206", Device Package="1206 (3216 Metric)", Manufacturer=Yageo, Operating Temperature="-55°C ~ 170°C", Power (Watts)="0.25W, 1/4W", Ratings=AEC-Q200, Resistance="10 mOhms", Supplier Device Package=1206, Temperature Coefficient=±50ppm/°C, Tolerance=±1%, ComponentLink1Description=Datasheet, ComponentLink1URL=https://www.yageo.com/upload/media/product/productsearch/datasheet/rchip/PYu-PA0100_2512_51_RoHS_2.pdf, ComponentLink2Description="DigiKey Link", ComponentLink2URL=https://www.digikey.com/en/products/detail/yageo/PA1206FRE070R01Z/16641940, Composition="Metal Element", Features="Automotive AEC-Q200, Current Sense, Moisture Resistant", Height - Seated (Max)="0.026\" (0.65mm)", lastupdated="9/4/2023 7:42:27 PM", Lifecycle Status=Active, Minimum Order=1, Number of Terminations=2, Package / Case="1206 (3216 Metric)", packaging=TapeAndReel, Part Number=PA1206FRE070R01Z, Part Status=Active, partid=75858, price=0.04, series=PA, Size / Dimension="0.126\" L x 0.063\" W (3.20mm x 1.60mm)"
R21: library part CMP-329-006639-1, "RES 0 OHM JUMPER 1/4W 1206", Device Package="1206 (3216 Metric)", Manufacturer=Yageo, Operating Temperature="-55°C ~ 155°C", Power (Watts)="0.25W, 1/4W", Resistance="0 Ohms", Supplier Device Package=1206, Tolerance=Jumper, ComponentLink1Description=Datasheet, ComponentLink1URL=https://www.yageo.com/upload/media/product/productsearch/datasheet/rchip/PYu-RC_Group_51_RoHS_L_10.pdf, ComponentLink2Description="DigiKey Link", ComponentLink2URL=https://www.digikey.com/en/products/detail/yageo/RC1206JR-070RL/729184, Composition="Thick Film", Features="Moisture Resistant", Height - Seated (Max)="0.026\" (0.65mm)", lastupdated="9/4/2023 7:43:30 PM", Lifecycle Status=Active, Minimum Order=1, Number of Terminations=2, Package / Case="1206 (3216 Metric)", packaging=TapeAndReel, Part Number=RC1206JR-070RL, Part Status=Active, partid=39273, price=0.01, series=RC_L, Size / Dimension="0.122\" L x 0.063\" W (3.10mm x 1.60mm)"
RV1: "Varistor", Manufacturer_Name=Bourns, Datasheet Link=https://www.bourns.com/docs/product-datasheets/mov07d.pdf, Height=13.5mm, Manufacturer_Part_Number=MOV-07D781KK
TR1: library part CMP-013-00040-5, "B66317G0160X187 GAPPED N87 CORE", Manufacturer_Part_Number=B66317G0160X187, ComponentLink1Description="New link", Design Item ID=FlybackTransformer, Source=FlybackTransformer.SchLib

## Free pads (board coordinates)
  round 3.2 hole 3.2 unplated: 6(5,4) 6(5,46) 6(95,4) 6(95,46)

## Via types
v1: diameter 0.7, hole 0.3, Top Layer to Bottom Layer, tented both sides, 53 vias
v2: diameter 1.27, hole 0.711, Top Layer to Bottom Layer, 48 vias

## Nets (pads, with @x,y where several pads share a name; then routed paths per layer and width w, separated by ;. In a path a pad name is that pad's centre, name@x,y a point inside that pad or via, vN(x,y) a via of type N, cw(c..) or ccw(c..) an arc to the next point about the centre after c; other vN are vias at no path point)
BPS: C17.1 IC1.4 | length 4.6
  Bottom Layer w0.254: IC1.4 67.175,14.875 68.05,14 C17.1
FB_1V265: C10.2 IC1.3 R12.1 R15.2 | length 17.4
  Bottom Layer w0.254: IC1.3 64.118,15.617 65.538,15.617 65.754,15.4 66.163,15.4 66.18,15.383 68.506,15.383 69.5,14.389 69.5,12.625 69.656,12.469 72.719,12.469 73.55,13.3 73.55,16.25 73.9,16.6 R15.2@75.75,16.6
GND: C5.2 C13.1 C16.2 IC1.16 L2.2 R8.1 R21.2 TR1.6 | length 13.1
  Bottom Layer w0.254: R21.2 48.473,4.623 48.773,4.623 50.611,6.461 50.611,7.761 51.05,8.2 53.101,8.2 53.25,8.349 53.25,10.898 53.101,11.047 52.053,11.047 51.39,11.71 IC1.16
  other v2: 32,4.65 25.4,6.95 27.581,6.959 29.698,6.959 31.998,6.959 34.242,9.282 36.611,9.324 38.842,9.32 41.098,9.32 43.254,9.32 27.581,9.459 29.698,9.459 31.998,9.459 25.613,9.55 34.242,11.782 36.611,11.824 38.842,11.82 41.098,11.82 43.254,11.82 45.498,11.82 27.581,11.859 29.698,11.859 31.998,11.859 34.242,14.182 27.581,14.234 29.698,14.234 31.998,14.234 36.611,14.224 38.842,14.22 41.098,14.22 43.254,14.22 45.498,14.22 36.611,16.599 38.842,16.595 41.098,16.595 43.254,16.595 45.498,16.595
GND2: C6.2 C7.2 C8.2 C9.1 C10.1 C15.2 C17.2 C18.2 IC1.2 Q1.3 R15.1 R17.2 | length 7.6
  Bottom Layer w0.254: IC1.2 68,16.375 ; v1(75.25,20.552) v1(76.55,20.552) v1(76.55,22.944)
  other v1: 71.156,15.45 71.156,16.85 85.504,16.85 84.137,18 71.376,18.2 81.356,19 82.746,19 84.137,19 72.187,19.372 73.55,19.625 82.721,20.395 81.356,20.552 75.25,21.695 75.25,22.944
IS: C15.1 IC1.1 R20.2 | length 5.8
  Bottom Layer w0.254: IC1.1 64.13,17.145 65.281,17.145 65.561,17.425 C15.1@66.5,17.425 ; C15.1 66.877,17.775 67.2,18.098 R20.2
NetC1_1: C1.1 R5.2 R6.2
NetC1_2: C1.2 C3.1 C6.1 L1.2 R3.2 R4.2 R10.2 TR1.1
NetC2_1: C2.1 D1.2 L1.1 R2.2
NetC2_2: C2.2 C4.1 R2.1 R7.2
NetC3_2: C3.2 C5.1 R3.1 R8.2
NetC4_2: C4.2 L2.1 P1.1 R7.1 RV1.1
NetC7_1: C7.1 D5.1 R14.1
NetC13_2: C13.2 D4.2 R13.2 R16.2 | length 62.6
  Top Layer w0.254: v1(35.9,42.651) 34.126,42.651 29,37.525 29,19.104 26.2,16.304 26.2,13 23.5,10.3 23.5,5.126 25.376,3.25 38.7,3.25 39.2,3.75 v1(39.2,5.927)
NetC16_1: C16.1 D7.1 IC1.14 R16.1 | length 2.9
  Bottom Layer w0.254: C16.1 48.575,9.625 IC1.14
NetD1_1: D1.1 R1.2 RV1.2
NetD2_1: D2.1 IC1.24 TR1.2
  other v1: 49.242,17.229 49.25,18.5 50.75,18.5 52.25,18.5
NetD2_2: D2.2 R4.1 R5.1 R6.1
NetD4_1: D4.1 TR1.5
NetD5_2: D5.2 Q1.2 R14.2 R18.2 TR1.4 | length 34.8
  Top Layer w0.254: v1(64.562,22.565) 64.562,7.506 64.768,7.3 v1(65.9,7.3)
  Bottom Layer w0.254: v1(64.562,22.565) 64.562,24.763 65.149,25.35 77.965,25.35 Q1.2@78.5,25.885 ; v1(65.9,7.3) 66.004,7.404 66.404,7.404 67.1,8.1 R18.2
  other v1: 73.973,25.53 75.439,25.53 76.906,25.53 78.373,25.53 73.981,26.982 75.448,26.982 76.915,26.982 78.381,26.982 73.981,28.289 75.448,28.289 76.915,28.289 78.381,28.289 73.981,29.541 75.448,29.541 76.915,29.541 78.381,29.541 73.981,30.991 75.448,30.991 76.915,30.991 78.381,30.991
  other v2: 68.723,26.282 70.254,26.282 72.003,26.282 68.723,28.147 70.254,28.147 72.003,28.147 67.1,28.172 67.016,30 68.723,30.097 70.254,30.097 72.003,30.097
NetD6_1: D6.1 R13.1
NetD6_2: D6.2 D7.2
NetIC1_5: IC1.5 Q1.1 | length 25.6
  Top Layer w0.254: v1(65.838,18.92) 65.869,18.889 65.869,14.031 v1(65.9,14)
  Bottom Layer w0.254: IC1.5 64.173,14.063 65.838,14.063 v1(65.9,14) ; v1(65.838,18.92) 65.838,23.183 67.016,24.362 76.918,24.362 78.43,22.85 Q1.1
NetIC1_7: IC1.7 R18.1 | length 4.8
  Bottom Layer w0.254: IC1.7 65.315,12.625 67.268,10.672 68.078,10.672 R18.1@68.1,10.65
NetIC1_13: IC1.13 R11.1 R21.1 | length 31
  Bottom Layer w0.254: R11.1 27.773,2.852 27.773,2.576 29.349,1 45.675,1 46.5,1.825 46.5,5.625 47.302,6.427 47.302,6.477 47.775,6.95 R21.1 49.35,6.95 49.95,7.55 49.95,8 50.727,8.777 50.727,8.797 50.805,8.875 IC1.13
NetP1_2: P1.2 R1.1
NetR10_1: R10.1 R11.2
Output_RTN: C11.1 C12.1 C14.1 C19.2 C20.2 D8.1 P2.4 P2.5 P2.6 R17.1 R20.1 | length 22.5
  Top Layer w0.254: v1(70,22.25) 70,24 70.475,24.475 82.424,24.475 v1(85.504,21.395)
  Bottom Layer w0.254: R20.1 v1(70,22.25) ; v1(85.504,21.395) 85.546,21.395 87.041,19.9 R17.1
  other v1: 91.097,44.581 89.938,44.63 89.921,45.774 91.097,45.823
VCC_+24V0: C8.1 C9.2 C11.2 C12.2 C14.2 C18.1 C19.1 C20.1 D8.2 IC1.6 P2.1 P2.2 P2.3 R12.2 TR1.3 | length 12.5
  Bottom Layer w0.254: IC1.6 65.283,13.375 65.815,12.843 66.157,12.843 67.039,11.961 73.539,11.961 74.1,11.4 75.7,11.4 R12.2
pads on no net: IC1.8 IC1.9 IC1.10 IC1.11 IC1.12 IC1.15

## Polygon pours and split planes (outlines as drawn)
Output_RTN on Bottom Layer "OUTPUT_RTN_L02_P042" (solid, remove dead copper, pour order 42): 86.901,21.83 86.375,21.304 86.375,19.372 88.366,19.372 88.625,19.63 88.625,25.825 89,26.176 92.414,26.176 92.414,35.799 91.578,36.635 78,36.635 78,32.774 86.493,32.774 86.901,32.325
NetC16_1 on Bottom Layer "NETC16_1_L02_P023" (solid, pour order 23): 42.755,7.499 44.499,7.499 47,10 49.6,10 49.6,8.875 49.225,8.5 46.95,8.5 46.25,7.8 46.25,6.488 45.389,5.627 42.489,5.627 42.479,7.223
NetC1_2 on Bottom Layer "NETC1_2_L02_P059" (solid, pour order 59): 37.314,24 43.7,24 44.95,25.25 47.45,25.25 50.575,28.375 54.188,28.375 54.188,26.563 49.625,22 36.75,22 32.45,17.7 25.984,17.7 24.284,16 24.284,13.31 20.525,9.55 20.525,2.962 20.088,2.525 18.7,2.525 18.6,2.625 18.6,11.6 18.914,11.914 21.108,11.914 22.25,13.056 22.25,17.25 23.8,18.8 27.9,18.8 29.7,20.6 29.7,23.107 29.764,23.171 36.485,23.171
GND on Bottom Layer "GND_L02_P025" (solid, pour order 25): 24.308,5.85 24.9,5.258 24.9,5.25 29.2,5.25 29.7,4.75 29.7,3.376 30.851,2.225 33.3,2.225 34,2.925 33.967,2.958 33.967,7.867 34.55,8.45 44.548,8.45 46.998,10.9 52.176,10.9 52.25,10.974 52.25,13.5 51.75,14 47.739,14 46.85,14.889 46.85,17.877 45.726,19 37.05,19 34.05,16 26.788,16 26.788,11.664 24.308,9.184
NetC2_1 on Bottom Layer "NETC2_1_L02_P058" (solid, pour order 58): 18.3,17.68 18.3,22.3 19,23 27.333,23 27.8,22.533 27.8,21.3 26.995,20.495 21.884,20.495 21,19.611 21,14.328 19.947,13.275 18.16,13.275 17.417,12.532 17.417,7.167 15.75,5.5 12.227,5.5 12.033,5.694 12.033,8.393 12.053,8.414 15.889,8.414 16.49,9.015 16.49,15.87
NetP1_2 on Bottom Layer "NETP1_2_L02_P000" (solid, pour order 0): 10,13.225 6,13.225 6,22.491 10,22.491
NetD5_2 on Bottom Layer "NETD5_2_L02_P037" (solid, remove dead copper, pour order 37): 82.3,32.525 85.95,32.525 85.95,27.25 83.65,27.25 82.4,28.5 80.25,28.5 79.65,27.9 79.65,25.176 64.704,25.176 64.457,25.423 64.457,31.757 65.225,32.525
NetC13_2 on Bottom Layer "NETC13_2_L02_P011" (solid, pour order 11): 35.75,44.75 36.034,45.034 38.291,45.034 38.65,44.675 38.65,42.663 39.25,42.063 39.25,40.079 38.921,39.75 36.548,39.75 35.75,40.548
NetC13_2 on Bottom Layer "NETC13_2_L02_P022" (solid, pour order 22): 37.155,7.527 41.019,7.527 41.019,5.368 40.978,5.327 37.155,5.327
Output_RTN on Bottom Layer "OUTPUT_RTN_L02_P057" (solid, pour order 57): 77.625,46.613 92,46.613 92,43.653 80.153,43.653 79.75,43.25 77.625,43.25
GND2 on Bottom Layer "GND2_L02_P027" (solid, pour order 27): 84.381,20.9 84.996,20.285 84.996,18.5 85.321,18.2 88.066,18.2 88.366,17.9 88.366,16.25 88.068,15.951 82.746,15.951 82.375,16.322 82.375,17.825 82,18.2 74.9,18.2 74.65,18.45 72.681,18.45 72.006,17.775 72.006,13.24 70.278,13.24 70.131,13.387 70.131,15.9 66.179,15.9 66.031,16.048 66.156,16.9 69.981,16.9 70.631,17.55 70.631,19.1 72.668,21.137 72.668,23.525 77.235,23.525 77.235,20.395 79.859,20.395 80.831,21.367 80.831,23.8 82.2,23.8 82.2,21.49 82.752,20.9
VCC_+24V0 on Bottom Layer "Bottom Layer-VCC_+24V0" (solid, pour order 44): 91.627,37.863 91.627,37.809 93,36.435 93,25.676 92.5,25.176 89.448,25.176 89,24.729 89,16.2 87.952,15.152 82.998,15.152 82.6,14.754 82.6,12.721 83.071,12.25 83.608,12.25 84.655,11.202 84.721,11.202 84.721,9.5 83.321,8.1 81.512,8.1 77.625,11.987 75.106,11.987 75.106,6.194 76.005,5.295 89.508,5.295 92.25,8.037 94.748,8.037 97,10.289 97,38.081 91.981,43.1 81.399,43.1 80.299,42 75.75,42 75,42.75 75,44.074 74.95,44.901 74,45.851 66.152,45.851 64,43.699 64,34.5 65.5,33 74.696,33 74.95,33.254 74.95,37.05 75.763,37.863
NetD2_1 on Bottom Layer "NETD2_1_L02_P017" (solid, pour order 17): 52.75,19.25 53,19 53,16.75 52.75,16.5 48.833,16.5 48.5,16.833 48.5,18.92 48.83,19.25
NetC4_2 on Bottom Layer "NETC4_2_L02_P051" (solid, pour order 51): 12.75,25.25 11,27 8,27 6.616,28.384 6.642,29.866 6.642,35.892 9.85,39.1 18.1,39.1 19.2,40.2 19.2,46.075 21.625,48.5 29.875,48.5 30.5,47.875 30.5,45.75 29.75,45 26.613,45 25.25,43.637 25.25,39 26.25,38 27.649,38 28.1,37.549 28.1,35.8 27.8,35.5 18.05,35.5 16.25,33.7 16.25,25.25
NetC2_2 on Bottom Layer "NETC2_2_L02_P003" (solid, remove dead copper, pour order 3): 28,32.9 27.6,32.5 26.288,32.5 25.613,31.825 25.613,26.937 26.3,26.25 27.888,26.25 28,26.1 28,25 26,25 25.5,25.5 19.75,25.5 19,26.25 19,33.338 19.662,34 25,34 25.5,34.5 28,34.5
NetC3_2 on Bottom Layer "NETC3_2_L02_P007" (solid, pour order 7): 29.3,33 29.6,32.7 31.7,32.7 32.387,32.013 32.387,26.787 31.7,26.1 30,26.1 29.746,25.846 29.756,25.104 30.062,24.799 35.549,24.799 36,25.25 36,33.5 35.5,34 32.5,34 32,34.5 29.884,34.5 29.3,33.916
NetD4_1 on Bottom Layer "NETD4_1_L02_P012" (solid, pour order 12): 40.42,41.949 40.646,42.175 46.325,42.175 46.75,41.75 46.75,38.25 46.25,37.75 43.75,37.75 43.25,38.25 43.25,39.25 42.75,39.75 40.623,39.75 40.42,39.953
NetD2_1 on Bottom Layer "NETD2_1_L02_P013" (solid, pour order 13): 44.75,27.75 44,28.5 44,34.052 44.599,34.651 46.929,34.651 47.486,34.094 47.486,28.236 47,27.75
NetD2_2 on Bottom Layer "NETD2_2_L02_P014" (solid, pour order 14): 48.5,34.127 48.973,34.6 54.076,34.6 54.46,34.216 54.46,29.46 54,29 49.067,29 48.5,29.567
NetC1_1 on Bottom Layer "NETC1_1_L02_P015" (solid, pour order 15): 55.802,34.6 57.302,34.6 57.75,34.152 57.75,26.55 57.3,26.1 55.769,26.1 55.25,26.619 55.25,34.17
NetR10_1 on Bottom Layer "NETR10_1_L02_P020" (solid, pour order 20): 21.656,4.157 25.15,4.157 25.15,2.488 21.644,2.488
NetD6_1 on Bottom Layer "NETD6_1_L02_P021" (solid, pour order 21): 36.63,4.125 38,4.125 38,2.491 37.043,2.491 34.844,2.491 34.654,2.681 34.654,7.227 35.75,7.227 35.75,5.005
NetD6_2 on Bottom Layer "NETD6_2_L02_P024" (solid, pour order 24): 40.5,2.5 44,2.5 45.75,2.5 45.998,2.748 45.998,4.296 46,4.298 45.798,4.5 44,4.5 40.5,4.5
FB_1V265 on Bottom Layer "FB_1V265_L02_P028" (solid, pour order 28): 79.65,15.954 79.449,15.751 77.355,15.751 77.35,15.756 77.028,15.756 77.028,13.48 76.698,13.15 74.65,13.15 74.65,13.165 74.307,13.508 74.333,17.5 79.5,17.5 79.65,17.35
NetC7_1 on Bottom Layer "NETC7_1_L02_P034" (solid, pour order 34): 80.403,27.25 82.6,27.25 83.85,26 86,26 86.5,25.5 86.5,23.299 86.145,22.944 83.831,22.944 83.5,23.275 83.5,24.153 83.292,24.362 80.863,24.362 80.403,24.822
GND on Bottom Layer "GND_L02_P049" (solid, pour order 49): 33.9,39 34.65,38.25 35,38.25 35.75,37.5 35.75,36.25 35.149,35.649 29.806,35.649 29.4,36.054 29.4,39.802 27.567,41.635 27.594,42.544 28.175,43.125 31,43.125 32.387,44.512 32.387,46.987 33.61,48.21 47.474,48.21 48.4,47.284 48.4,43.492 48.058,43.15 43.057,43.15 40,46.207 35.707,46.207 34.35,44.85 34.35,43.385 33.9,42.935
NetD1_1 on Bottom Layer "NETD1_1_L02_P050" (solid, pour order 50): 15,21.713 15.434,21.28 15.434,10.533 15,10.1 12.741,10.1 12,10.841 12,21.191 12.559,21.75 13.938,21.713
NetC1_2 on Top Layer "NETC1_2_L01_P060" (solid, pour order 60): 54.5,5.504 54.5,1.283 21.842,1.283 20.9,2.225 20.9,11.5 20.4,12 19,12 19,2.25 20.525,0.725 55.498,0.725 55.498,5.504
NetD5_2 on Top Layer "NETD5_2_L01_P053" (solid, remove dead copper, pour order 53): 82.322,32.537 85.972,32.537 85.972,27.262 83.672,27.262 82.422,28.512 80.272,28.512 79.672,27.912 79.672,25.188 64.725,25.188 64.479,25.435 64.479,31.768 65.247,32.537
Output_RTN on Top Layer "OUTPUT_RTN_L01_P055" (solid, pour order 55): 77.625,46.613 91.439,46.613 92.966,45.086 92.966,26.526 92.471,26.031 88.521,26.031 87.821,26.731 87.821,42.106 86.746,43.181 77.694,43.181 77.625,43.25
GND2 on Top Layer "GND2_L01_P052" (solid, pour order 52): 81.274,23.525 84.404,20.395 85.083,19.716 85.91,18.889 87.978,18.889 89,17.866 89,2.587 87.088,0.674 58.697,0.674 58.717,2.849 58.718,2.964 63.464,2.964 65.9,5.4 65.9,21.9 67.525,23.525
NetD2_1 on Top Layer "NETD2_1_L01_P016" (solid, pour order 16): 43.75,28.65 43.75,29.875 44.375,30.5 52.122,30.5 53.022,29.6 53.022,16.772 52.75,16.5 48.833,16.5 48.5,16.833 48.5,27 47.75,27.75 44.25,27.75
GND on Top Layer "GND_L01_P045" (solid, pour order 45): 34.034,16.017 33.842,15.825 27.529,15.825 26.81,15.106 26.822,15.094 26.822,11.716 24.322,9.216 24.322,5.828 24.926,5.224 26.325,3.825 37.89,3.825 38.268,4.203 38.268,6.52 38.765,7.016 40.011,7.016 40.42,6.607 40.42,3.825 50.508,3.825 50.508,13.798 50.266,14.04 47.638,14.04 46.85,14.842 46.85,17.938 45.537,19.25 42.881,19.25 42,20.131 42,31.575 43.425,33 50.833,33 53,35.167 53,46.25 51.05,48.2 44.317,48.2 43.556,47.507 43.556,43.944 44.375,43.125 48.038,43.125 48.833,42.329 48.833,37.25 48.083,36.5 43,36.5 40.42,33.92 40.42,19.67 39.75,19 37.017,19

## Silkscreen, mask and mechanical layers (free items; w line width, h text height)
Top Overlay:
  drawing of 38 lines, arcs and shapes, not listed
  text "DC-" at 4.754,33.904 h1.52
  text "GND" at 88.746,29.254 h1.52 r90
  text "24V" at 88.746,17.679 h1.52 r90
  text "DC+" at 4.754,15.004 h1.52
Bottom Overlay:
  drawing of 20 lines, arcs and shapes, not listed
Dimensions:
  the board outline again, w0.254
Top 3D Body: